# Altium PCB PCB_LNA_BFU550.PcbDoc
Units mil, origin at the board's own origin, x right, y up, seen from the top; angles counter-clockwise.
Board outline 2385 x 1195 mil, 2 copper layers (Top Layer, Bottom Layer); 29 components, 15 nets, 66 pads, 105 vias.
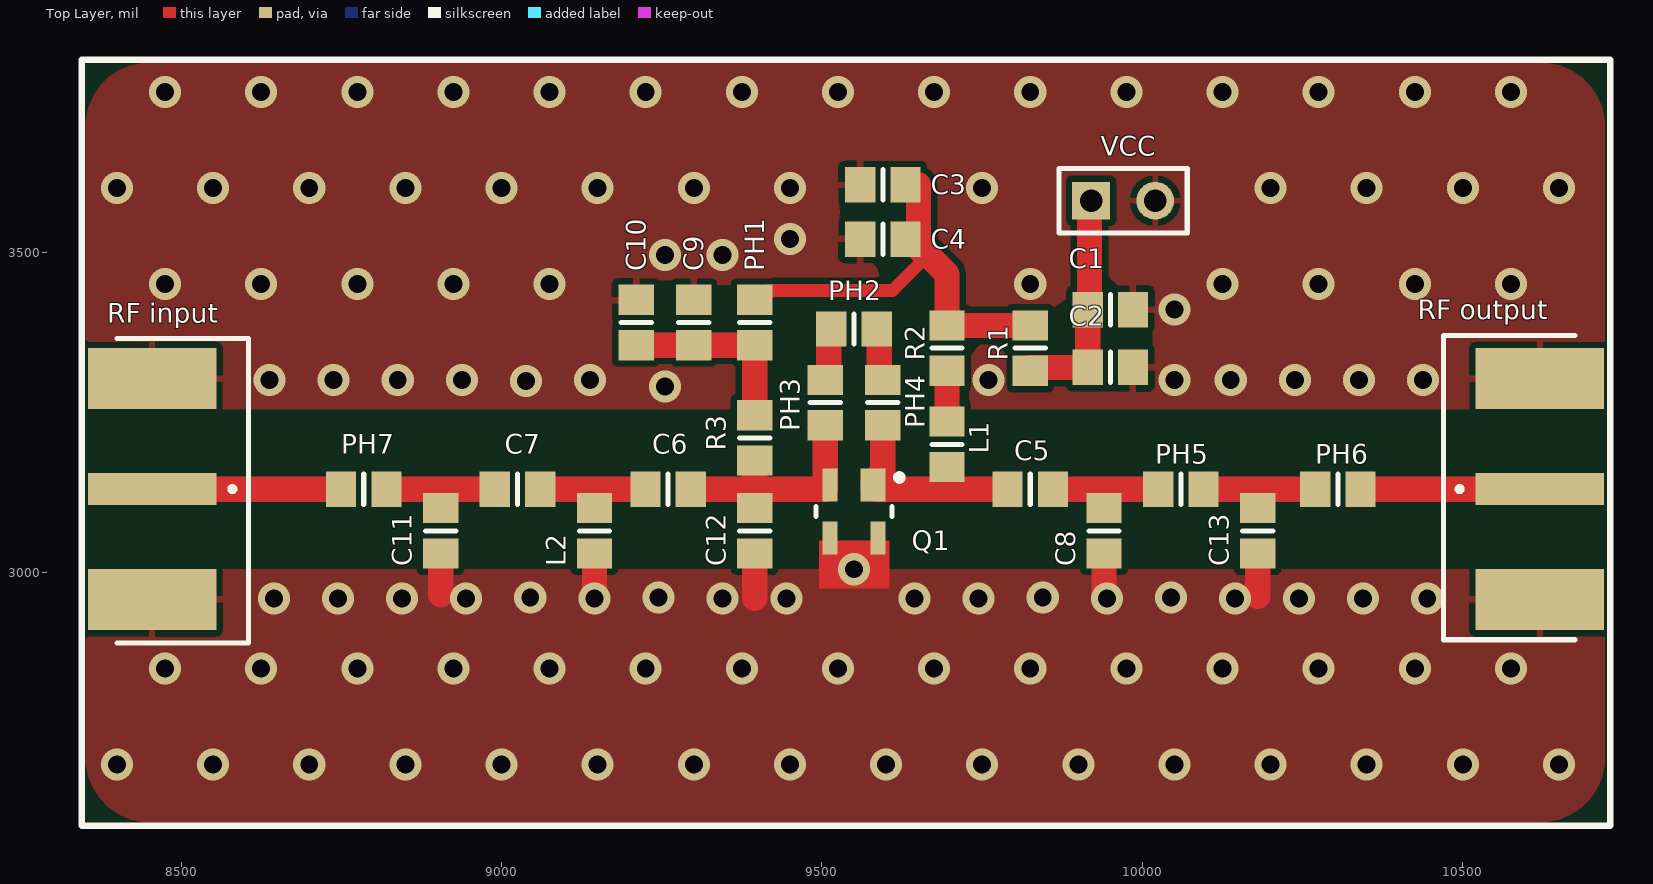
[diagram p0: Top Layer view]
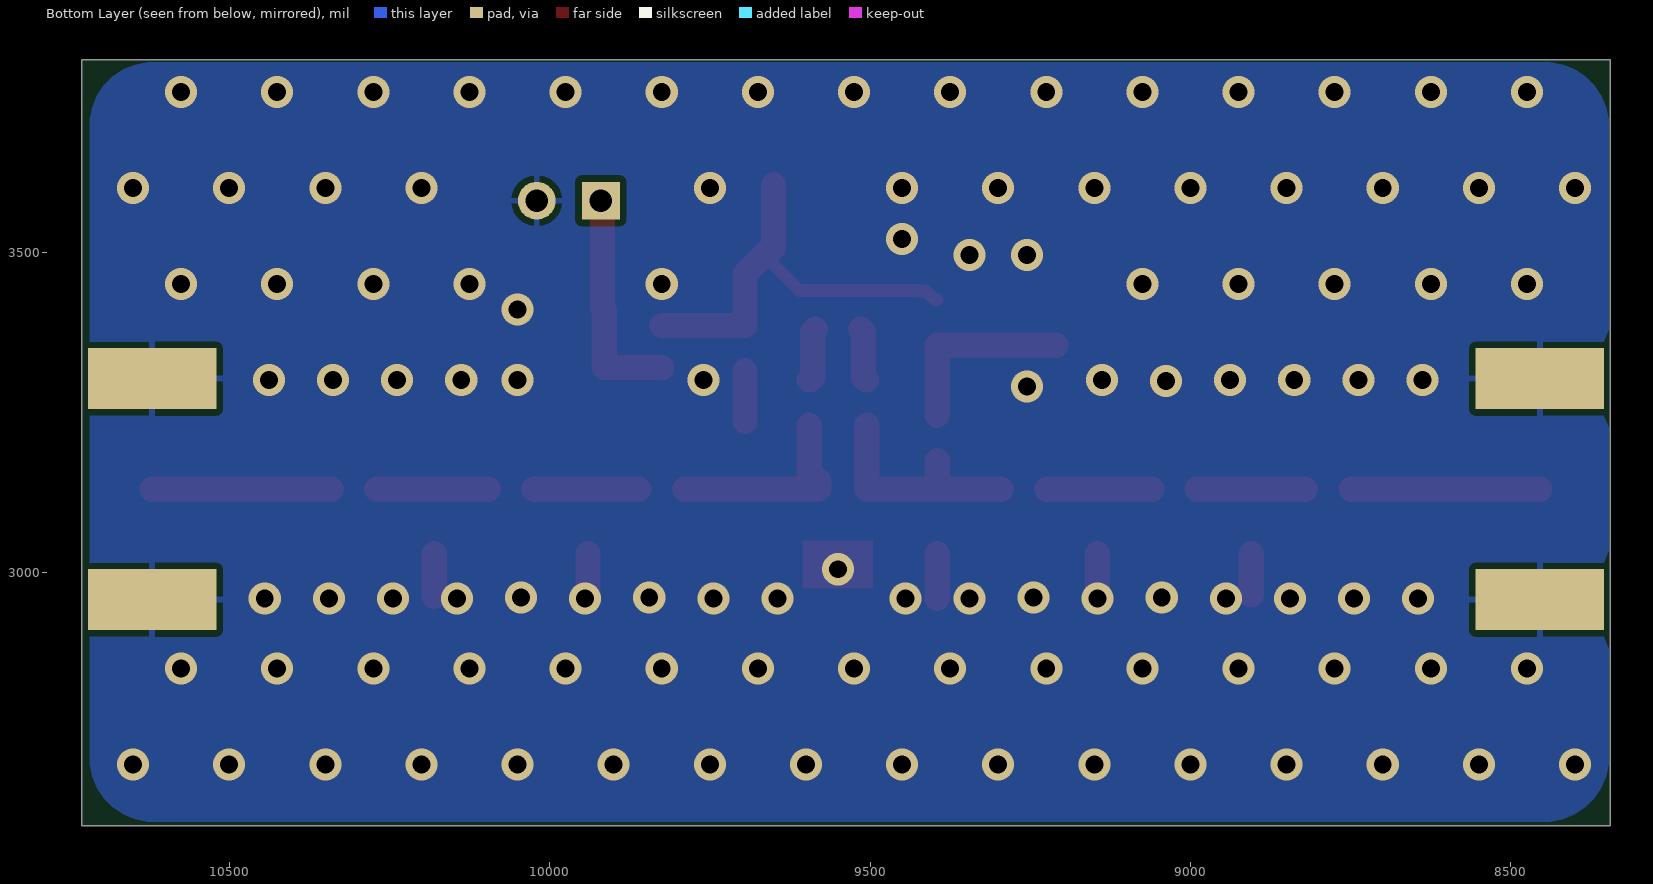
[diagram p1: Bottom Layer view, seen from below]

## Layer stack, top to bottom
Top Solder: solder mask 0.4, Solder Resist, Dk 3.5
Top Layer: signal copper 1.4
Dielectric 1: dielectric 12.6, FR-4, Dk 4.8
Bottom Layer: signal copper 1.4
Bottom Solder: solder mask 0.4, Solder Resist, Dk 3.5

## Board outline
8345,2605 8345,3800 10730,3800 10730,2605

## Design rules (kind name [scope] priority, off if disabled: settings)
Clearance [All] p1: gap=10 ignorepadtopadclearanceinfootprint=FALSE except(0: Arc-Hole Track-Hole SMDPad-Hole THPad-Hole Via-Hole Fill-Hole Poly-Hole Region-Hole Text-Hole)
MinimumSolderMaskSliver [All] p1: minsoldermaskwidth=6
PolygonConnect PolygonConnect_via [IsVia vs IsPolygon] p1: connectstyle=Direct reliefconductorwidth=10 reliefentries=4 polygonreliefangle="90 Angle" airgapwidth=10
PolygonConnect [All] p2: connectstyle=Relief reliefconductorwidth=10 reliefentries=4 polygonreliefangle="90 Angle" airgapwidth=10
RoomDefinition LNA_BFU500 [InComponentClass('LNA_BFU500')] p1: confinementstyle=ConfineIn formatcopy=TRUE lockcomponents=FALSE outline 7045,1060 11830,1060 11830,4385 7045,4385
RoutingVias [All] p1: holewidth=28 width=50 viastyle="Through Hole" minholewidth=28 minwidth=50 maxholewidth=28 maxwidth=50
SilkToSilkClearance [All] p1: silktosilkclearance=6
SilkToSolderMaskClearance [IsPad] p1: minsilkscreentomaskgap=6 clearancetoexposedcopper=TRUE
SolderMaskExpansion [All] p1: expansion=4
Width [All] p1: maxlimit=100 minlimit=10 preferedwidth=10
27 further rules are at their usual default settings.

## Components (designator, comment, footprint, x,y, rotation, side; value= is the part's Value field where it differs from the comment)
C1 "Cap Pol2" 6-0805_N 9950,3410 r0 top value=56nF
C2 "Cap Pol2" 6-0805_N 9950,3320 r0 top value=220pF
C3 "Cap Pol2" 6-0805_N 9595,3605 r180 top value=3.9nF
C4 "Cap Pol2" 6-0805_N 9595,3520 r180 top value=220pF
C5 "Cap Pol2" 6-0805_N 9825,3130 r0 top value=8.2pF
C6 "Cap Pol2" 6-0805_N 9260,3130 r0 top value=82pF
C7 "Cap Pol2" 6-0805_N 9025,3130 r0 top value=47pF
C8 "Cap Pol2" 6-0805_N 9940,3065 r270 top value=1.5pF
C9 "Cap Pol2" 6-0805_N 9300,3390 r90 top value="no mounted"
C10 "Cap Pol2" 6-0805_N 9210,3390 r90 top value="no mounted"
C11 "Cap Pol2" 6-0805_N 8905,3065 r270 top value="no mounted"
C12 "Cap Pol2" 6-0805_N 9395,3065 r270 top value="no mounted"
C13 "Cap Pol2" 6-0805_N 10180,3065 r270 top value="no mounted"
L1 "Inductor" 6-0805_N 9695,3200 r270 top value=8.2nH
L2 "Inductor" 6-0805_N 9145,3065 r270 top value=10nH
PH1 "Res1" 6-0805_N 9395,3390 r90 top value=0
PH2 "Res1" 6-0805_N 9550,3380 r0 top value=0
PH3 "Res1" 6-0805_N 9505,3265 r90 top value=0
PH4 "Res1" 6-0805_N 9595,3265 r90 top value=0
PH5 "Res1" 6-0805_N 10060,3130 r0 top value=0
PH6 "Res1" 6-0805_N 10305,3130 r0 top value=0
PH7 "Res1" 6-0805_N 8785,3130 r0 top value=0
Q1 "NPN" SOT-143_N 9550,3095 r270 top
R1 "" 6-0805_N 9825,3350 r270 top value=22
R2 "0" 6-0805_N 9695,3350 r90 top value=10
R3 "0" 6-0805_N 9395,3210 r90 top value=10K
"RF input" "SMB" SMA-142-0701-851_V2 8455,3130 r270 top
"RF output" "SMB" SMA-142-0701-851_V2 10620,3130 r90 top
VCC "Header 2" HDR1X2 9920,3580 r0 top

## Footprints (in the part's own frame and the unit in brackets; to place one, negate y for a bottom-side part, rotate by r counter-clockwise, add the part's x,y. Pads: shape width x height; smd on the part's side, far side on the other; paste and mask are expansions set on the pad)
6-0805_N [mm]
  rect 1.2x1.4 smd: 1(-0.9,0) 2(0.9,0)
  silkscreen extent 0,-0.6 0,0.6, body extent -1.07,-0.7 1.07,0.7, height 0.7
HDR1X2 [mm]
  rect 1.5x1.5 hole 0.9: 1(0,0)
  round 1.5 hole 0.9: 2(2.54,0)
  silkscreen extent -1.27,-1.27 3.81,1.27
SMA-142-0701-851_V2 [mil] "SMA 50 Ohm, End Launch Jack Receptacle, Tab Contact"
  rect 50x200 smd: 1(0,0)
  rect 95x200 smd: 2(-172.5,0) 2(172.5,0)
  rect 95x200 smd far side: 2(-172.5,0) 2(172.5,0)
  silkscreen extent -235,-55 240,150, body extent -187,-475 188,87, height 161
SOT-143_N [mm] "SOT143, 4-Leads, Body 2.9x1.3mm, Pitch 1.9mm, Lead Span 2.5mm, IPC Medium Density"
  rect 1.3x1 smd: 1(-1.05,0.75)
  rect 1.3x0.6 smd: 2(-1.05,-0.95) 3(1.05,-0.95) 4(1.05,0.95)
  silkscreen extent -1.47,-1.5 0.2,1.93, body extent -0.7,-1.52 0.7,1.52, height 1.1

## Part data
C1 C2 C3 C4 C5 C6 C7 C8: library part "Cap Pol2_1", "Polarized Capacitor (Axial)", LatestRevisionDate=17-Jul-2002, LatestRevisionNote="Re-released for DXP Platform.", PackageDescription="Polarized Capacitor; 2 Leads", PackageReference=POLAR0.8, Published=8-Jun-2000, Publisher="Altium Limited"
C9 C10 C11 C12 C13: library part "Cap Pol2_7", "Polarized Capacitor (Axial)", LatestRevisionDate=17-Jul-2002, LatestRevisionNote="Re-released for DXP Platform.", PackageDescription="Polarized Capacitor; 2 Leads", PackageReference=POLAR0.8, Published=8-Jun-2000, Publisher="Altium Limited"
PH1 PH2 PH3 PH4 PH5 PH6 PH7: library part Res1_1, "Resistor", LatestRevisionDate=17-Jul-2002, LatestRevisionNote="Re-released for DXP Platform.", PackageDescription="Axial Device, Thru-Hole; 2 Leads; 0.3 in Pin Spacing", PackageReference=AXIAL-0.3, Published=8-Jun-2000, Publisher="Altium Limited"
Q1: "NPN Bipolar Transistor", Code_JEDEC=TO-226-AA, LatestRevisionDate=17-Jul-2002, LatestRevisionNote="Re-released for DXP Platform.", PackageDescription="TO, Flat Index; 3 In-Line, Axial Leads; Body Dia. 4.8mm; Leads 0.55 x 0.51 mm (max)", PackageReference=TO-226-AA, Published=8-Jun-2000, Publisher="Altium Limited"
R1 R2 R3: library part Res1, "Resistor", LatestRevisionDate=17-Jul-2002, LatestRevisionNote="Re-released for DXP Platform.", PackageDescription="Axial Device, Thru-Hole; 2 Leads; 0.3 in Pin Spacing", PackageReference=AXIAL-0.3, Published=8-Jun-2000, Publisher="Altium Limited"
"RF input" "RF output": "SMB Straight Connector", LatestRevisionDate=17-Jul-2002, LatestRevisionNote="Re-released for DXP Platform.", Publisher="Altium Limited"
VCC: "Header, 2-Pin", LatestRevisionDate=17-Jul-2002, LatestRevisionNote="Re-released for DXP Platform.", Publisher="Altium Limited"
L1 L2: Code_IEC=1005, Code_JEITA=0402, LatestRevisionDate=29-May-2009, LatestRevisionNote="IPC-7351 Footprint Added.", PackageDescription="Chip Inductor", PackageReference=0402-A, Published=8-Jun-2000, Publisher="Altium Limited"

## Via types
v1: diameter 50, hole 28, Top Layer to Bottom Layer, 105 vias

## Nets (pads, with @x,y where several pads share a name; then routed paths per layer and width w, separated by ;. In a path a pad name is that pad's centre, name@x,y a point inside that pad or via, vN(x,y) a via of type N, cw(c..) or ccw(c..) an arc to the next point about the centre after c; other vN are vias at no path point)
GND: "RF input.2" "RF output.2" C1.2 C2.2 C3.2 C4.2 C8.2 C9.2 C10.2 C11.2 C12.2 C13.2 L2.2 Q1.3 Q1.4 VCC.2 | length 343.9
  Top Layer w39.37: 8905,2965 C11.2 ; v1(9144.8,2959.47) 9145,2959.67 L2.2 ; 9395,2959.47 C12.2 ; C8.2 9940,2963.93 v1(9944.47,2959.47) ; 10180,2962.5 C13.2
  other v1: 8400,2700 8550,2700 8700,2700 8850,2700 9000,2700 9150,2700 9300,2700 9450,2700 9600,2700 9750,2700 9900,2700 10050,2700 10200,2700 10350,2700 10500,2700 10650,2700 8475,2850 8625,2850 8775,2850 8925,2850 9075,2850 9225,2850 9375,2850 9525,2850 9675,2850 9825,2850 9975,2850 10125,2850 10275,2850 10425,2850 10575,2850 8644.81,2959.47 8744.81,2959.47 8844.81,2959.47 8944.81,2959.47 9344.77,2959.47 9444.77,2959.47 9644.48,2959.47 9744.48,2959.47 10144.44,2959.47 10244.44,2959.47 10344.44,2959.47 10444.44,2959.47 9044.8,2960.7 9244.78,2961.06 9844.48,2960.72 10044.46,2961.03 9550,3005 9255,3290 9038.06,3298.77 9760,3300 10050,3300 10337.86,3300.33 8638.08,3300.53 8738.08,3300.53 8838.08,3300.53 8938.08,3300.53 9138.05,3300.53 10137.86,3300.53 10237.86,3300.53 10437.86,3300.53 10050,3410 8475,3450 8625,3450 8775,3450 8925,3450 9075,3450 9825,3450 10125,3450 10275,3450 10425,3450 10575,3450 9255,3495 9345,3495 9450,3520 8400,3600 8550,3600 8700,3600 8850,3600 9000,3600 9150,3600 9300,3600 9450,3600 9750,3600 10200,3600 10350,3600 10500,3600 10650,3600 8475,3750 8625,3750 8775,3750 8925,3750 9075,3750 9225,3750 9375,3750 9525,3750 9675,3750 9825,3750 9975,3750 10125,3750 10275,3750 10425,3750 10575,3750
NetC1_1: C1.1 C2.1 R1.2 VCC.1 | length 352
  Top Layer w39.37: R1.2@9825,3319.57 9825.22,3319.78 9914.35,3319.78 C2.1 C1.1 9917.28,3412.72 9917.28,3577.28 VCC.1
NetC3_1: C3.1 C4.1 PH1.2 R1.1 R2.2 | length 665.6
  Top Layer w19.68: PH1.2 9398.94,3425.43 9412.72,3439.21 9423.46,3439.21 9424.25,3440 9610,3440 9662.5,3492.5 ; C4.1@9650.43,3506.06 C4.1@9650.43,3510
  Top Layer w39.37: C4.1@9650.43,3506.06 9654.37,3502.13 9658.31,3502.13 9695,3465.43 R2.2 R1.1 ; C4.1@9650.43,3510 C3.1@9650.43,3605
NetC5_1: C5.1 L1.2 PH4.1 Q1.1 | length 315.8
  Top Layer w39.37: PH4.1 9595,3157.72 9579.53,3142.24 Q1.1 9579.53,3130.43 9585.43,3130.43 9585.87,3130 C5.1
NetC5_2: C5.2 C8.1 PH5.1 | length 164.1
  Top Layer w39.37: C5.2 PH5.1
NetC6_1: C6.1 C7.2 L2.1 | length 164.1
  Top Layer w39.37: C7.2 C6.1
NetC6_2: C6.2 C12.1 PH3.1 Q1.2 R3.1 | length 353.3
  Top Layer w39.37: C6.2 9395,3130 ; R3.1 9395,3130 ; PH3.1 9505,3130.71 9504.29,3130 9395,3130
NetC7_1: C7.1 C11.1 PH7.2 | length 169.1
  Top Layer w39.37: PH7.2 C7.1
NetC9_1: C9.1 C10.1 PH1.1 R3.2 | length 294.1
  Top Layer w39.37: C10.1 C9.1 PH1.1 R3.2
NetC13_1: C13.1 PH5.2 PH6.1 | length 174.1
  Top Layer w39.37: PH5.2 PH6.1
NetL1_1: L1.1 R2.1 | length 79.1
  Top Layer w39.37: L1.1 R2.1
NetPH2_1: PH2.1 PH3.2 | length 84.5
  Top Layer w39.37: PH3.2 9506.69,3300.43 9510.63,3304.37 9510.63,3376.06 PH2.1
NetPH2_2: PH2.2 PH4.2 | length 84.5
  Top Layer w39.37: PH2.2 9589.37,3376.06 9589.37,3304.37 9593.31,3300.43 PH4.2
NetPH6_2: "RF output.1" PH6.2 | length 279.6
  Top Layer w39.37: PH6.2 10620,3130
NetPH7_1: "RF input.1" PH7.1 | length 294.6
  Top Layer w39.37: 8455,3130 PH7.1

## Polygon pours and split planes (outlines as drawn)
GND on Bottom Layer "GND_L02_P000" (solid, remove dead copper, pour order 0): 8447.68,2611.25 cw(c8447.68,2711.25) 8347.68,2711.25 8347.68,3696.25 cw(c8447.68,3696.25) 8447.68,3796.25 10617.68,3796.25 cw(c10617.68,3696.25) 10717.68,3696.25 10717.68,2711.25 cw(c10617.68,2711.25) 10617.68,2611.25
GND on Top Layer "GND_L01_P001" (solid, remove dead copper, pour order 1): 8451.21,2610.56 cw(c8451.21,2710.56) 8351.21,2710.56 8351.21,3695.56 cw(c8451.21,3695.56) 8451.21,3795.56 10621.21,3795.56 cw(c10621.21,3695.56) 10721.21,3695.56 10721.21,2710.56 cw(c10621.21,2710.56) 10621.21,2610.56

## Other copper
Top Layer:
  rectangle net GND: 9495,2975 9605,3050
  pour cut-out: 8355,3255 8355,3005 10720,3005 10720,3255

## Silkscreen, mask and mechanical layers (free items; w line width, h text height)
Top Overlay:
  lines w10: 8345,2605 10730,2605 10730,3800 8730,3800 8345,3800 8345,2605

## Dimensions
8345,3800 to 8345,2605 on Top Overlay
8345.2,3795.98 to 10730,3800 on Top Overlay

## Text inside footprints (layer, text, board x,y; h text height)
"RF input": Mechanical 13 "PCB EDGE" at 8365,2870 h24
"RF output": Mechanical 13 "PCB EDGE" at 10710,3390 h24 r180